# Altium PCB us_#1.PcbDoc
Units mil, origin at the board's own origin, x right, y up, seen from the top; angles counter-clockwise.
Board outline 1397.64 x 1968.5 mil, 2 copper layers (Top Layer, Bottom Layer); 23 components, 13 nets, 121 pads, 6 vias.
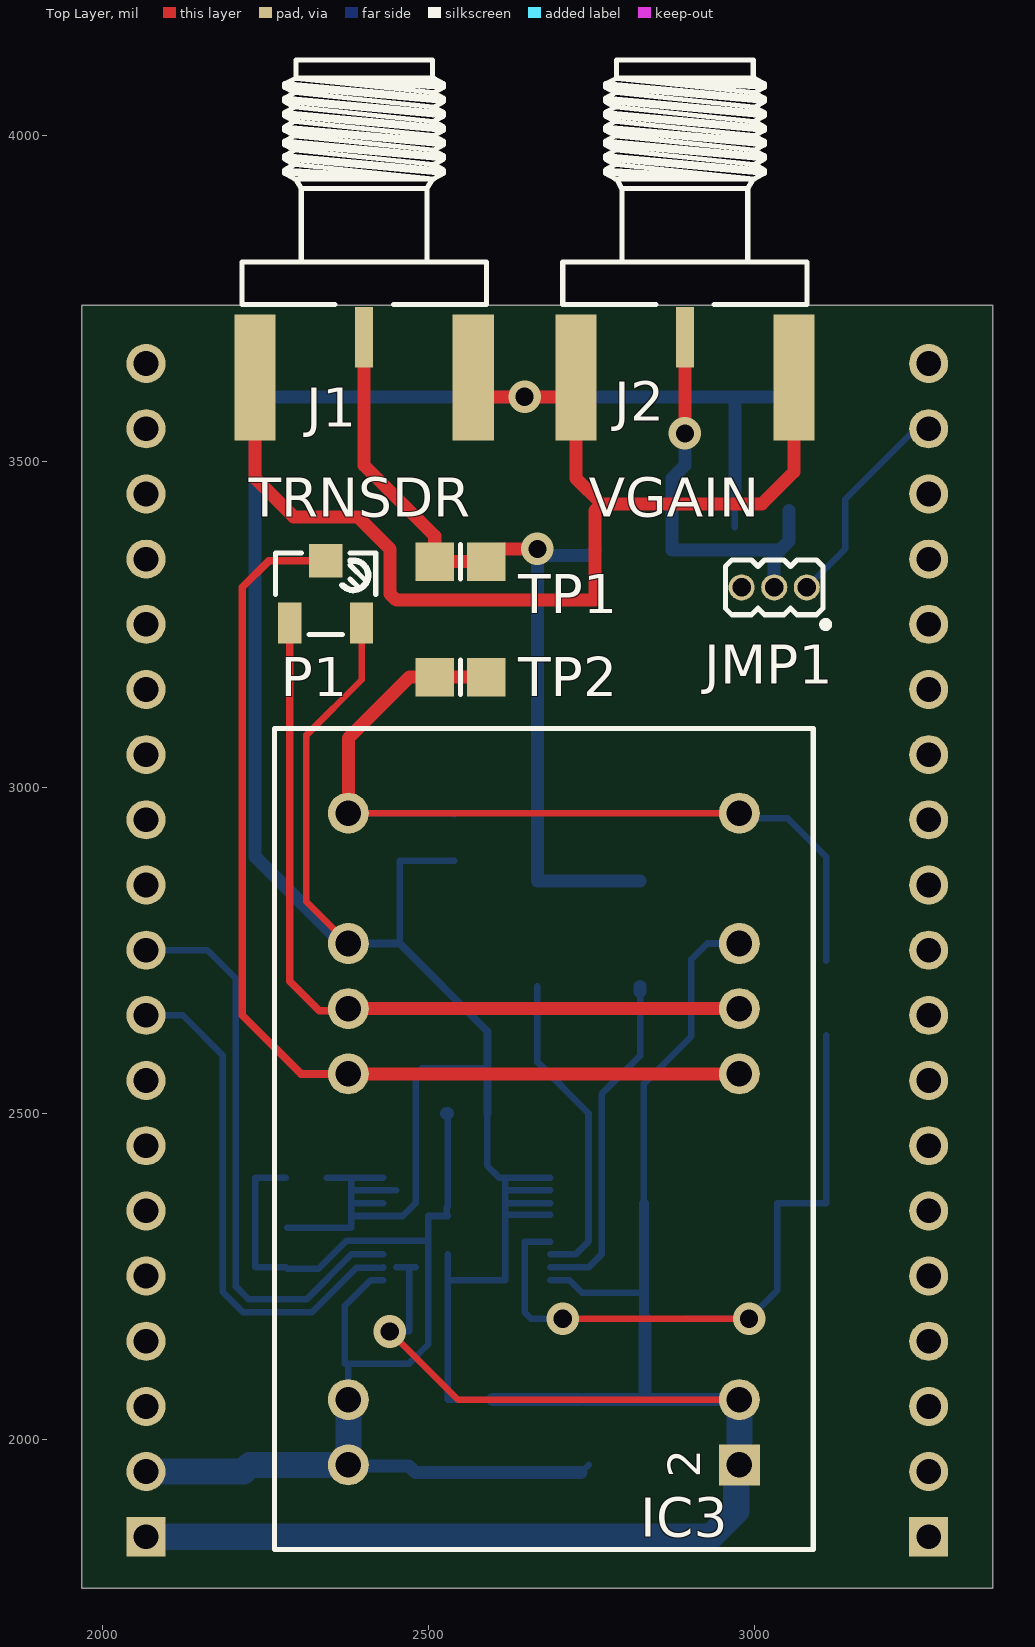
[diagram p0: Top Layer view]
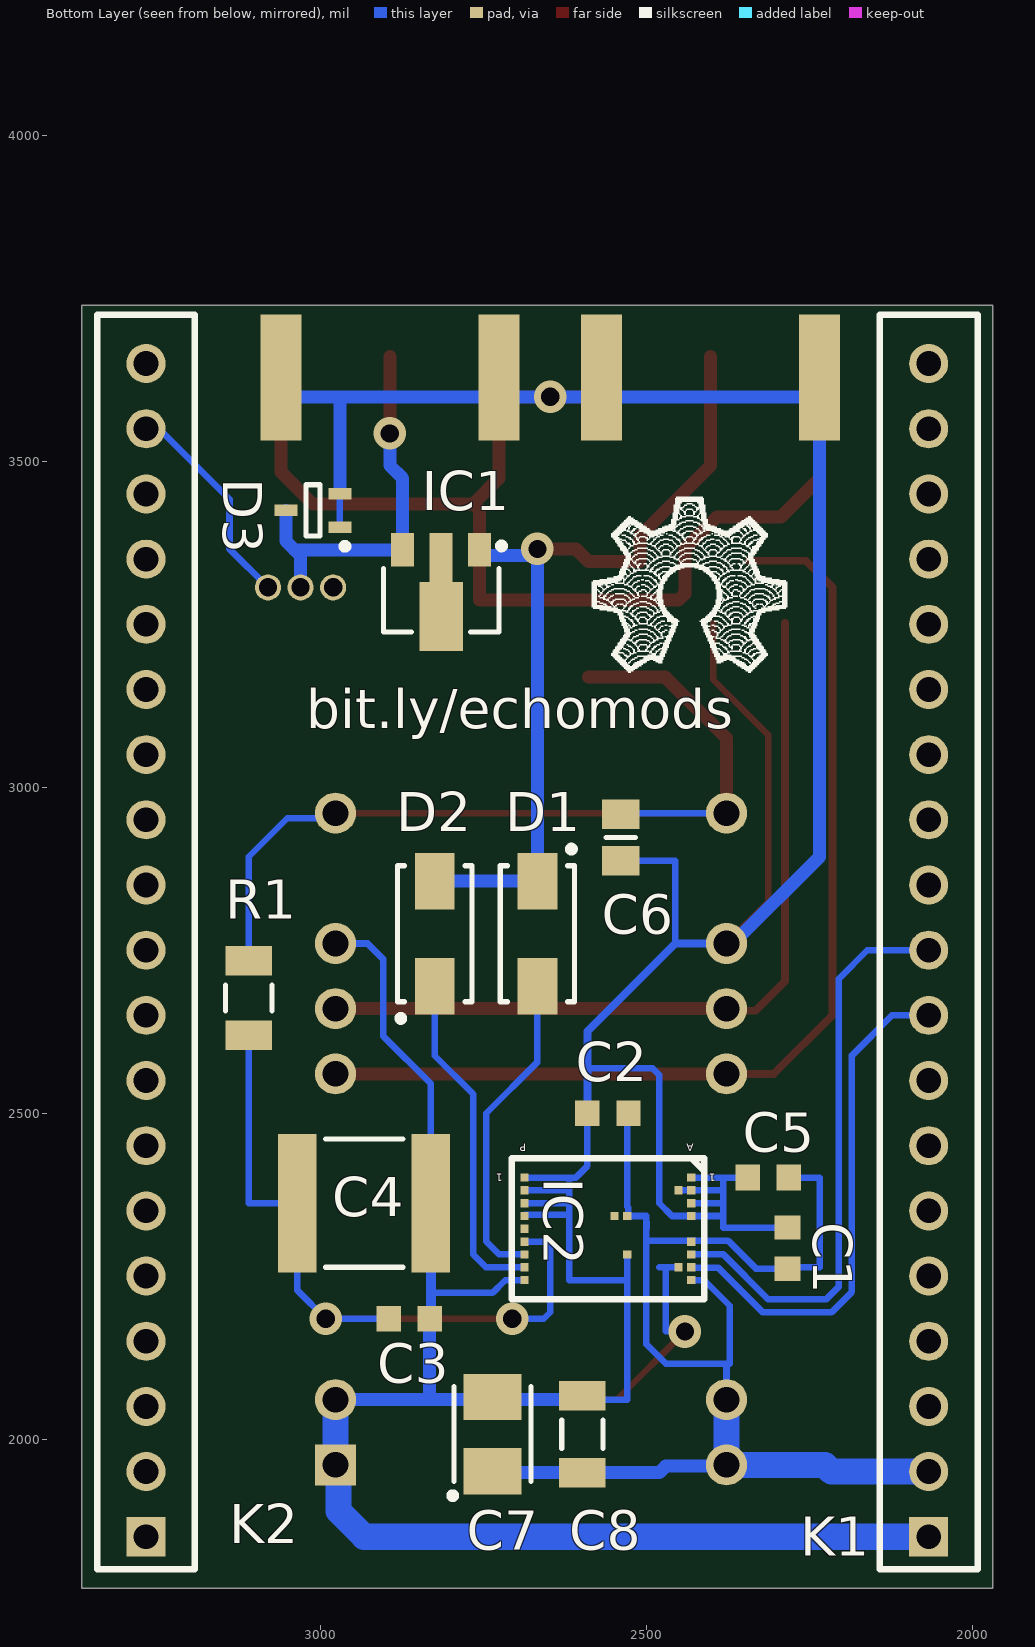
[diagram p1: Bottom Layer view, seen from below]
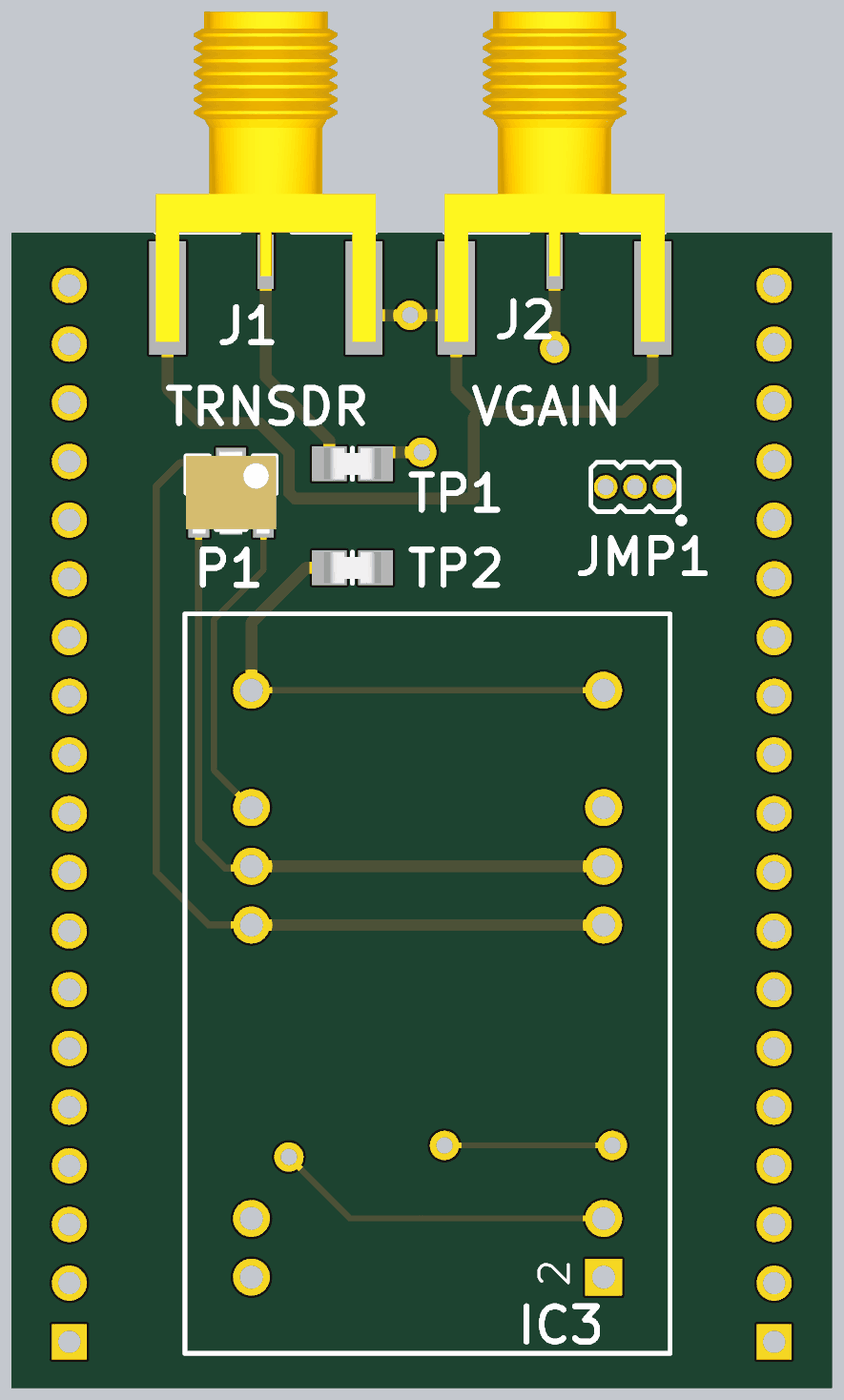
[diagram p2: 3D render of the assembled board from above, using the file's embedded part models]
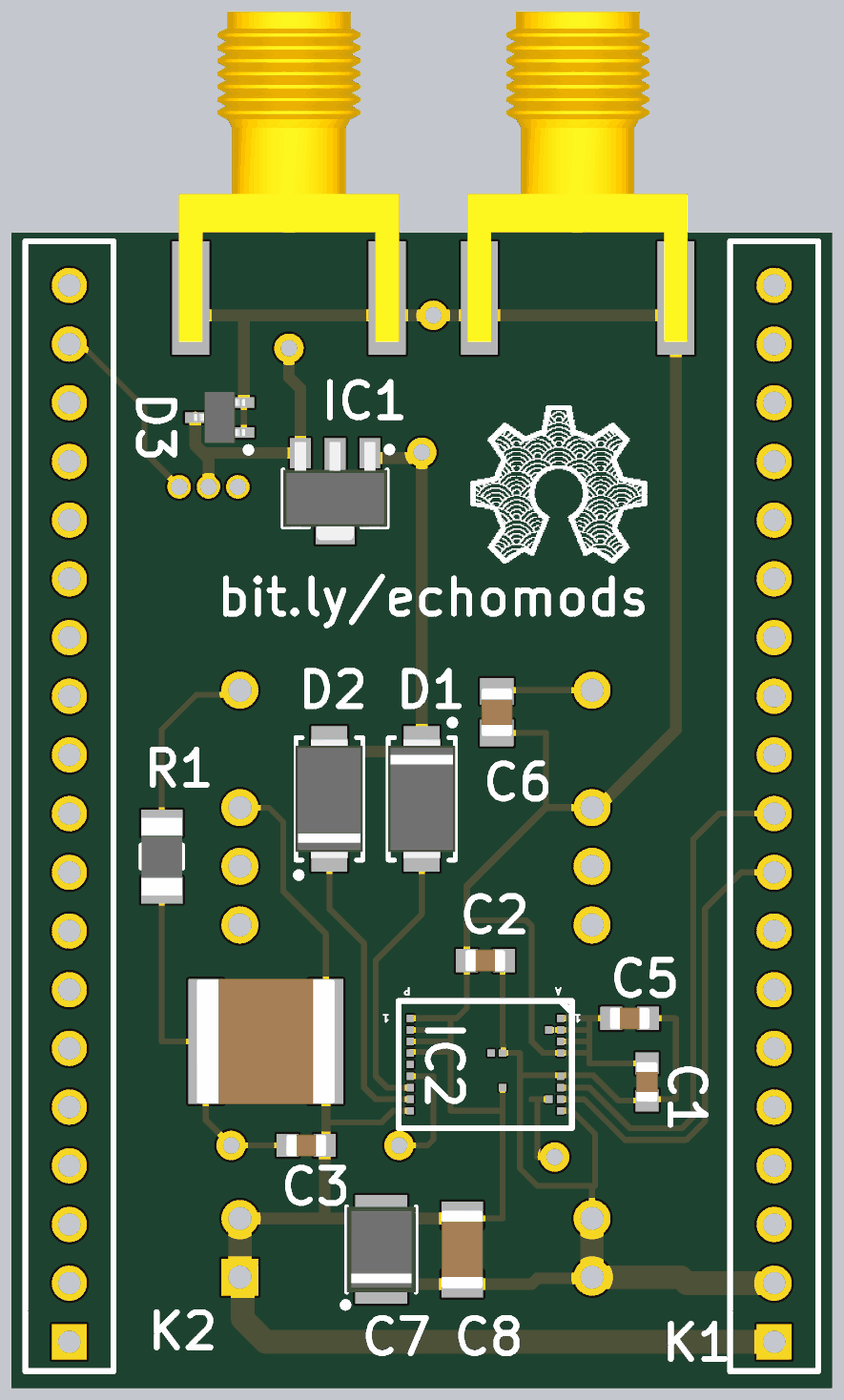
[diagram p3: 3D render of the assembled board from below, using the file's embedded part models]

## Layer stack, top to bottom
Top Solder: solder mask 0.4, Solder Resist, Dk 3.5
Top Layer: signal copper 1.4
Dielectric 1: dielectric 12.6, FR-4, Dk 4.8
Bottom Layer: signal copper 1.4
Bottom Solder: solder mask 0.4, Solder Resist, Dk 3.5

## Board outline
1968.5,1771.65 3366.14,1771.65 3366.14,3740.16 1968.5,3740.16

## Design rules (kind name [scope] priority, off if disabled: settings)
Clearance [All] p1: gap=7
PolygonConnect [All] p1: connectstyle=Relief reliefconductorwidth=10 reliefentries=4 polygonreliefangle="90 Angle" airgapwidth=10
RoutingVias [All] p1: holewidth=28 width=50 viastyle="Through Hole" minholewidth=28 minwidth=50 maxholewidth=28 maxwidth=50
SolderMaskExpansion [All] p1: expansion=4
Width [All] p1: maxlimit=40 minlimit=10 preferedwidth=10 minimp=50.000000 maximp=50.000000 favimp=50.000000
29 further rules are at their usual default settings.

## Classes and differential pairs
net class RF: NetD1_1 NetD3_3

## Components (designator, comment, footprint, x,y, rotation, side; value= is the part's Value field where it differs from the comment)
C1 "100nF" CAPC1608X87N 2283.46,2293.31 r270 bottom
C2 "100nF" CAPC1608X87N 2559.06,2500 r180 bottom
C3 "100nF" CAPC1608X87N 2864.17,2185.04 r0 bottom
C4 "1uF" CAPC5650X165N 2933.07,2362.2 r0 bottom
C5 "100nF" CAPC1608X87N 2312.99,2401.57 r180 bottom
C6 "4.7nF" CAPC2012X110N 2539.37,2923.23 r90 bottom
C7 "10uF" CAPMP3528X210N 2736.22,2007.87 r90 bottom
C8 "47uF" CAPC3216X180N 2598.43,2007.87 r270 bottom
D1 "ES1D" DIOM5027X244N 2667.32,2775.59 r270 bottom
D2 "ES1D" DIOM5027X244N 2824.8,2775.59 r90 bottom
D3 "BAT64-04W" SOT65P210X100-3N 3011.81,3425.2 r0 bottom
IC1 "MD0100N8-G" SOT89 2814.96,3287.4 r270 bottom
IC2 "HV7360LA-G" HV7360 2559.06,2322.83 r0 bottom
IC3 "R05-100B" PWS_RECOM_R05-100B 2677.17,2460.63 r90 top
J1 "SMA" AMPHENOL_132357-11 2401.57,3690.94 r270 top
J2 "SMA" AMPHENOL_132357-11 2893.7,3690.94 r270 top
JMP1 "Family" SULLINS_GRPB031VWVN 3080.71,3307.09 r180 top (schematic designator Jumper1)
K1 "PLS_2.54mm-19" PLS_2.54mm-19 2066.93,1850.39 r180 bottom
K2 "PLS_2.54mm-19" PLS_2.54mm-19 3267.72,1850.39 r180 bottom
P1 "5k" TRIM_BOURNS_3223W 2342.52,3297.24 r0 top
R1 "4k7" RESC3216X65N 3110.24,2677.17 r90 bottom
TP1 "Test Point" NICOMATIC_C12000B 2549.21,3346.46 r0 top
TP2 "Test Point" NICOMATIC_C12000B 2549.21,3169.29 r180 top

## Footprints (in the part's own frame and the unit in brackets; to place one, negate y for a bottom-side part, rotate by r counter-clockwise, add the part's x,y. Pads: shape width x height; smd on the part's side, far side on the other; paste and mask are expansions set on the pad)
AMPHENOL_132357-11 [mm]
  rect 2.35x0.7 smd: 1(0,0)
  rect 4.9x1.6 smd: 2(1.575,4.25) 2(1.575,-4.25)
  rect 4.9x1.6 smd far side: 2(1.575,4.25) 2(1.575,-4.25)
  silkscreen extent -10.81,-4.76 -1.28,4.76, body extent -10.8,-4.76 3.48,4.76, height 4.08
CAPC1608X87N [mm]
  rect 0.95x1 smd: 1(-0.8,0) 2(0.8,0)
  body extent -0.87,-0.47 0.88,0.48, height 0.87
CAPC2012X110N [mm]
  rect 1.15x1.45 smd: 1(-0.9,0) 2(0.9,0)
  silkscreen extent 0,-0.58 0,0.58, body extent -1.05,-0.67 1.05,0.68, height 1.1
CAPC3216X180N [mm]
  rect 1.15x1.8 smd: 1(-1.5,0) 2(1.5,0)
  silkscreen extent -0.55,-0.8 0.55,0.8, body extent -1.7,-0.9 1.7,0.9, height 1.8
CAPC5650X165N [mm]
  rect 1.5x5.4 smd: 1(-2.6,0) 2(2.6,0)
  silkscreen extent -1.5,-2.5 1.5,2.5, body extent -3,-2.7 3,2.7, height 1.65
CAPMP3528X210N [mm]
  rect 1.8x2.25 smd: 1(-1.45,0) 2(1.45,0)
  silkscreen extent -2.52,-1.5 1.85,1.68, body extent -1.85,-1.5 1.85,1.5, height 2.1
DIOM5027X244N [mm]
  rect 2.2x1.55 smd: 1(-2.05,0) 2(2.05,0)
  silkscreen extent -3.42,-1.45 2.65,1.45, body extent -2.6,-1.45 2.6,1.45, height 2.44
HV7360 [mm]
  rect 0.32x0.32 smd mask+0.075: A1(-3.25,-2) A2(-3.25,-1.5) A3(-3.25,-1) A4(-3.25,-0.5) A6(-3.25,0.5) A7(-3.25,1) A8(-3.25,1.5) A9(-3.25,2) B2(-2.75,-1.5) B8(-2.75,1.5) F4(-0.75,-0.5) F7(-0.75,1) G4(-0.25,-0.5) P1(3.25,-2) P2(3.25,-1.5) P3(3.25,-1) P4(3.25,-0.5) P5(3.25,0) P6(3.25,0.5) P7(3.25,1) P8(3.25,1.5) P9(3.25,2)
  silkscreen extent -3.75,-2.75 3.75,2.75
NICOMATIC_C12000B [mm]
  rect 1.5x1.5 smd: 1(-1,0) 1(1,0)
  silkscreen extent 0,-0.67 0,0.67, body extent -1.25,-0.67 1.25,0.68, height 1.5
PLS_2.54mm-19 [mil] "soldering pads"
  rect 60x60 hole 38: 1(0,0)
  round 60 hole 38: 2(0,100) 3(0,200) 4(0,300) 5(0,400) 6(0,500) 7(0,600) 8(0,700) 9(0,800) 10(0,900) 11(0,1000) 12(0,1100) 13(0,1200) 14(0,1300) 15(0,1400) 16(0,1500) 17(0,1600) 18(0,1700) 19(0,1800)
  silkscreen extent -75,-50 75,1875
PWS_RECOM_R05-100B [mm]
  rect 1.6x1.6 hole 1: 2(-12.7,-7.62)
  round 1.6 hole 1: 3(-10.16,-7.62) 8(2.54,-7.62) 9(5.08,-7.62) 10(7.62,-7.62) 12(12.7,-7.62) 13(12.7,7.62) 15(7.62,7.62) 16(5.08,7.62) 17(2.54,7.62) 22(-10.16,7.62) 23(-12.7,7.62)
  silkscreen extent -16,-10.5 16,10.5, body extent -16,-10.5 16,10.5, height 9.4
RESC3216X65N [mm]
  rect 1.15x1.8 smd: 1(-1.45,0) 2(1.45,0)
  silkscreen extent -0.5,-0.9 0.5,0.9, body extent -1.67,-0.87 1.68,0.88, height 0.65
SOT65P210X100-3N [mm]
  rect 0.9x0.45 smd: 1(-1.05,0.65) 2(-1.05,-0.65) 3(1.05,0)
  silkscreen extent -1.37,-1 0.28,1.52, body extent -1.1,-1.1 1.1,1.1, height 1
SOT89 [mm]
  rect 1.3x0.9 smd: 1(-1.965,1.5) 3(-1.965,-1.5)
  rect 1.9x0.9 smd: 2(-1.665,0)
  rect 2.7x1.7 smd: 2(0.635,0)
  silkscreen extent -2.24,-2.25 1.24,2.47, body extent -2.44,-2.25 1.81,2.25, height 1.6
SULLINS_GRPB031VWVN [mil]
  round 40 hole 28: 1(0,0) 2(50,0) 3(100,0)
  silkscreen extent -33,-42 125,61
TRIM_BOURNS_3223W [mm]
  rect 0.9x1.6 smd: 1(-1.4,-1.14) 3(1.4,-1.14)
  rect 1.3x1.3 smd: 2(0,1.29)
  silkscreen extent -1.95,-1.59 1.95,1.59, body extent -1.95,-1.81 1.95,1.81, height 4.16

## Part data
C1 C2 C3 C5: library part CC0603_100NF_50V_10%_X7R, "Non-polarised capacitor"
C4: library part CC2220_1UF_200V_10%_X7R, "Non-polarised capacitor"
C6: library part CC0805_4.7NF_250V_10%_X7R, "Non-polarised capacitor"
C7: library part CTE3528-21_10UF_16V_10%_LESR0800, "Polarised capacitor"
C8: library part CC1206_47UF_25V_20%_X5R, "Non-polarised capacitor"
D1 D2: "Diode"
D3: "Serial Diode"
IC1: "3-Ultra-Sound HV Switch 1=A 2=COM 3=B"
IC3: "Power Supply"
J1 J2: library part AMPHENOL_132357-11
JMP1: library part "Connector 3 Male", "Connector 3 Male"
P1: library part TRIM_11T_5K_BOURNS_3223W-1-502E, "Trimming Potentiometer"
R1: library part R1206_4K7_1%_0.25W_100PPM, "Resistor - 1%"
TP1 TP2: library part NICOMATIC_C12000B

## Via types
v1: diameter 50, hole 28, Top Layer to Bottom Layer, 6 vias

## Nets (pads, with @x,y where several pads share a name; then routed paths per layer and width w, separated by ;. In a path a pad name is that pad's centre, name@x,y a point inside that pad or via, vN(x,y) a via of type N, cw(c..) or ccw(c..) an arc to the next point about the centre after c; other vN are vias at no path point)
AGND: C1.1 C2.1 C3.1 C4.1 C5.1 C6.1 C7.2 C8.1 D3.1 D3.2 IC2.A1 IC2.A2 IC2.A3 IC2.A4 IC2.B2 IC2.B8 IC2.F7 IC2.P1 IC2.P2 IC2.P3 IC2.P4 IC2.P9 IC3.2 IC3.3 IC3.10 IC3.15 J1.2 J2.2 K1.1 P1.3 | length 9661.3
  Top Layer w10: IC3.15 2312.99,2824.8 2312.99,3080.71 2397.64,3165.35 P1.3 ; v1(2440.94,2165.35) 2545.67,2060.63 IC3.3
  Top Layer w20: J1.2@2234.25,3628.94 2234.25,3474.41 2293.31,3415.35 2391.73,3415.35 2440.94,3366.14 2440.94,3297.24 2450.79,3287.4 2755.91,3287.4 2755.91,3425.2 2765.75,3435.04 ; J1.2@2568.9,3599.41 2726.38,3599.41 2726.38,3474.41 2765.75,3435.04 ; J2.2@3061.02,3599.41 3061.02,3484.25 3011.81,3435.04 2765.75,3435.04
  Bottom Layer w10: C1.1 2381.89,2324.8 2381.89,2342.52 ; C5.1 2381.89,2401.57 ; IC2.A3 2381.89,2362.2 ; IC2.A1 2381.89,2401.57 ; v1(2440.94,2165.35) 2470.47,2165.35 2470.47,2263.78 ; IC2.B8 2480.32,2263.78 ; IC2.B2 IC2.A2 2381.89,2381.89 ; 2455.91,2760.63 2455.91,2887.8 C6.1 ; IC2.F7 2529.53,2244.09 ; C2.1 2590.55,2419.29 2608.27,2401.57 2618.11,2401.57 ; 2590.55,2568.9 2490.16,2568.9 2480.32,2559.06 2480.32,2362.2 2460.63,2342.52 IC2.A4 2381.89,2342.52 ; C8.1@2598.43,2060.63 2529.53,2060.63 2529.53,2244.09 ; IC2.P9 2716.54,2244.09 2736.22,2224.41 2830.71,2224.41 ; IC2.P4@2687.01,2344.13 2619.73,2344.13 2618.11,2342.52 ; IC2.P3 2618.11,2362.2 ; IC2.P2 2618.11,2381.89 ; IC2.P1 2618.11,2401.57 ; C3.1@2830.71,2187.01 C3.1 ; C4.1 2830.71,2545.28 2903.54,2618.11 2903.54,2736.22 2927.95,2760.63 IC3.10 ; D3.1 D3.2 ; 2381.89,2342.52 2381.89,2362.2 ; 2381.89,2362.2 2381.89,2381.89 ; 2381.89,2381.89 2381.89,2401.57 ; 2529.53,2244.09 2618.11,2244.09 2618.11,2342.52 ; 2618.11,2342.52 2618.11,2362.2 ; 2618.11,2362.2 2618.11,2381.89 ; 2618.11,2381.89 2618.11,2401.57
  Bottom Layer w12: IC3.15 2455.91,2760.63 2590.55,2625.98 2590.55,2568.9 C2.1
  Bottom Layer w15: C3.1@2830.71,2187.01 2830.71,2224.41 C4.1
  Bottom Layer w20: IC3.15@2367.32,2760.63 2234.25,2893.7 2234.25,3599.41 2970.47,3599.41 ; C8.1@2598.43,2060.63 C7.2@2731.89,2060.63 ; C7.2@2740.55,2060.63 IC3.3 ; 2832.68,2064.96 C3.1 ; D3.2 2970.47,3599.41 ; J2.2@3061.02,3599.41 2970.47,3599.41
  Bottom Layer w40: K1.1 2933.07,1850.39 2972.44,1889.76 2972.44,1955.91 IC3.2 IC3.3
  other v1: 2647.64,3599.41
HVOUT: C6.2 IC3.12 IC3.13 R1.2 TP2.1 | length 1448.5
  Top Layer w10: IC3.13 IC3.12
  Top Layer w20: IC3.13 2377.17,3075.59 2470.87,3169.29 2509.84,3169.29 TP2.1@2588.58,3169.29
  Bottom Layer w10: IC3.13 2537.4,2960.63 C6.2 ; IC3.12 2985.04,2952.76 3051.18,2952.76 3110.24,2893.7 R1.2
NetC3_2: C3.2 C4.2 IC2.P6 R1.1 | length 1120.4
  Top Layer w10: v1(2706.06,2185.04) v1(2992.13,2185.04)
  Bottom Layer w10: IC2.P6 2647.64,2303.15 2647.64,2194.88 2657.48,2185.04 v1(2706.06,2185.04) ; C3.2 v1(2992.13,2185.04) 3035.43,2228.35 C4.2 3110.24,2362.2 R1.1
NetD1_1: D1.1 D2.2 IC1.1 J1.1 TP1.1 | length 1275
  Top Layer w20: J1.1@2401.57,3661.42 2401.57,3494.09 2509.84,3385.83 2509.84,3346.46 2588.58,3346.46 2608.27,3366.14 v1(2667.32,3366.14)
  Bottom Layer w20: IC1.1 2747.44,3356.3 2667.32,3356.3 D1.1 D2.2
NetD1_2: D1.2 IC2.P7 | length 490.9
  Bottom Layer w10: D1.2 2667.32,2578.74 2745.75,2500.32 2745.75,2303.46 2725.75,2283.47 IC2.P7
NetD2_1: D2.1 IC2.P8 | length 567.6
  Bottom Layer w10: IC2.P8 2746.38,2264.09 ; 2701.45,2264.09 2746.38,2264.09 ; D2.1@2824.8,2687.01 2824.8,2588.58 2765.75,2529.53 2765.75,2283.46 2746.38,2264.09
  Bottom Layer w20: D2.1@2824.8,2687.01 D2.1
NetD3_3: D3.3 IC1.3 J2.1 JMP1.2 | length 598.2
  Top Layer w20: v1(2893.7,3543.31) J2.1@2893.7,3661.42
  Bottom Layer w20: v1(2893.7,3543.31) 2893.7,3494.09 2874.02,3474.41 IC1.3 3039.96,3364.76 ; JMP1.2 3030.71,3355.51 3039.96,3364.76 ; D3.3 3053.15,3377.95 3039.96,3364.76
NetIC3_8: IC3.8 IC3.17 P1.2 | length 1601.2
  Top Layer w12: P1.2 2255.51,3348.03 2214.57,3307.09 2214.57,2650.79 2304.72,2560.63 IC3.17
  Top Layer w20: IC3.17 IC3.8
NetIC3_9: IC3.9 IC3.16 P1.1 | length 1259.4
  Top Layer w12: P1.1 2287.4,2702.76 2332.68,2657.48 2374.02,2657.48 IC3.16
  Top Layer w20: IC3.16 IC3.9
NetJumper1_1: JMP1.1 K2.18 | length 312.6
  Bottom Layer w10: JMP1.1 3139.76,3366.14 3139.76,3442.13 K2.18@3248.03,3550.39
PULSE_A: IC2.A8 K1.9 | length 794.3
  Bottom Layer w10: K1.9 2123.23,2650.39 2184.72,2588.9 2184.72,2225.97 2216.13,2194.57 2321.28,2194.57 2390.17,2263.46 2430.79,2263.46 IC2.A8
PULSE_B: IC2.A7 K1.10 | length 891.4
  Bottom Layer w10: K1.10 2161.02,2750.39 2204.72,2706.69 2204.72,2234.25 2224.41,2214.57 2312.99,2214.57 2381.89,2283.46 IC2.A7
VDD_5V: C1.2 C2.2 C5.2 C7.1 C8.2 IC2.A6 IC2.A9 IC2.F4 IC3.22 IC3.23 K1.2 | length 2007.9
  Top Layer w40: K1.2 K1.2@2068.5,1948.82
  Bottom Layer w10: C5.2 2234.25,2401.57 2234.25,2263.78 2281.5,2263.78 C1.2 2331.95,2261.81 2374.9,2304.76 2500,2304.76 ; 2372.05,2116.14 2372.05,2204.72 2411.42,2244.09 IC2.A9 ; IC3.22 2377.17,2111.02 ; 2377.17,2116.14 2470.47,2116.14 2500,2145.67 2500,2342.52 IC2.F4 ; 2499.6,2323.64 2499.6,2333.08 ; IC2.F4@2527.91,2344.13 2527.91,2355.03 2529.53,2356.65 C2.2@2529.53,2500 ; C7.1@2734.25,1948.82 C7.1 C7.1@2746.06,1960.63
  Bottom Layer w20: IC3.23@2379.13,1958.66 2470.47,1958.66 2480.31,1948.82 C8.2 C7.1@2734.25,1948.82 ; C2.2 C2.2@2529.53,2500
  Bottom Layer w40: K1.2@2065.35,1948.82 K1.2 2216.14,1950.39 2226.38,1960.63 IC3.23 IC3.22
pads on no net: IC1.2 IC2.G4 IC2.P5 JMP1.3 K1.3 K1.4 K1.5 K1.6 K1.7 K1.8 K1.11 K1.12 K1.13 K1.14 K1.15 K1.16 K1.17 K1.18 K1.19 K2.1 K2.2 K2.3 K2.4 K2.5 K2.6 K2.7 K2.8 K2.9 K2.10 K2.11 K2.12 K2.13 K2.14 K2.15 K2.16 K2.17 K2.19

## Silkscreen, mask and mechanical layers (free items; w line width, h text height)
Top Overlay:
  text "TRNSDR" at 2224.41,3415.35 h60
  text "VGAIN" at 2746.06,3415.35 h60
Bottom Overlay:
  drawing of 1520 lines, arcs and shapes, not listed
  text "bit.ly/echomods" at 3021.65,3090.55 h60
Mechanical 1:
  lines w10: 1968.5,1771.65 3366.14,1771.65 3366.14,1914.37 3366.14,2121.06 3366.14,2283.46 3366.14,2529.53 3366.14,2982.28 3366.14,3228.35 3366.14,3390.75 3366.14,3597.44 3366.14,3740.16 1968.5,3740.16 1968.5,1771.65

## Text inside footprints (layer, text, board x,y; h text height)
IC2: Bottom Overlay "P" at 2684.06,2453.74 h11.81 r180; Bottom Overlay "1" at 2720.47,2407.48 h11.81 r180; Bottom Overlay "1" at 2393.7,2407.48 h11.81 r180; Bottom Overlay "A" at 2427.17,2453.74 h11.81 r180
IC3: Top Overlay "2" at 2917.17,1940.63 h50 r90